# Altium PCB HAT_ID01_OLED.PcbDoc
Units mm, origin at the board's own origin, x right, y up, seen from the top; angles counter-clockwise.
Board outline 65 x 56 mm, 2 copper layers (Top Layer, Bottom Layer); 57 components, 64 nets, 212 pads, 39 vias.
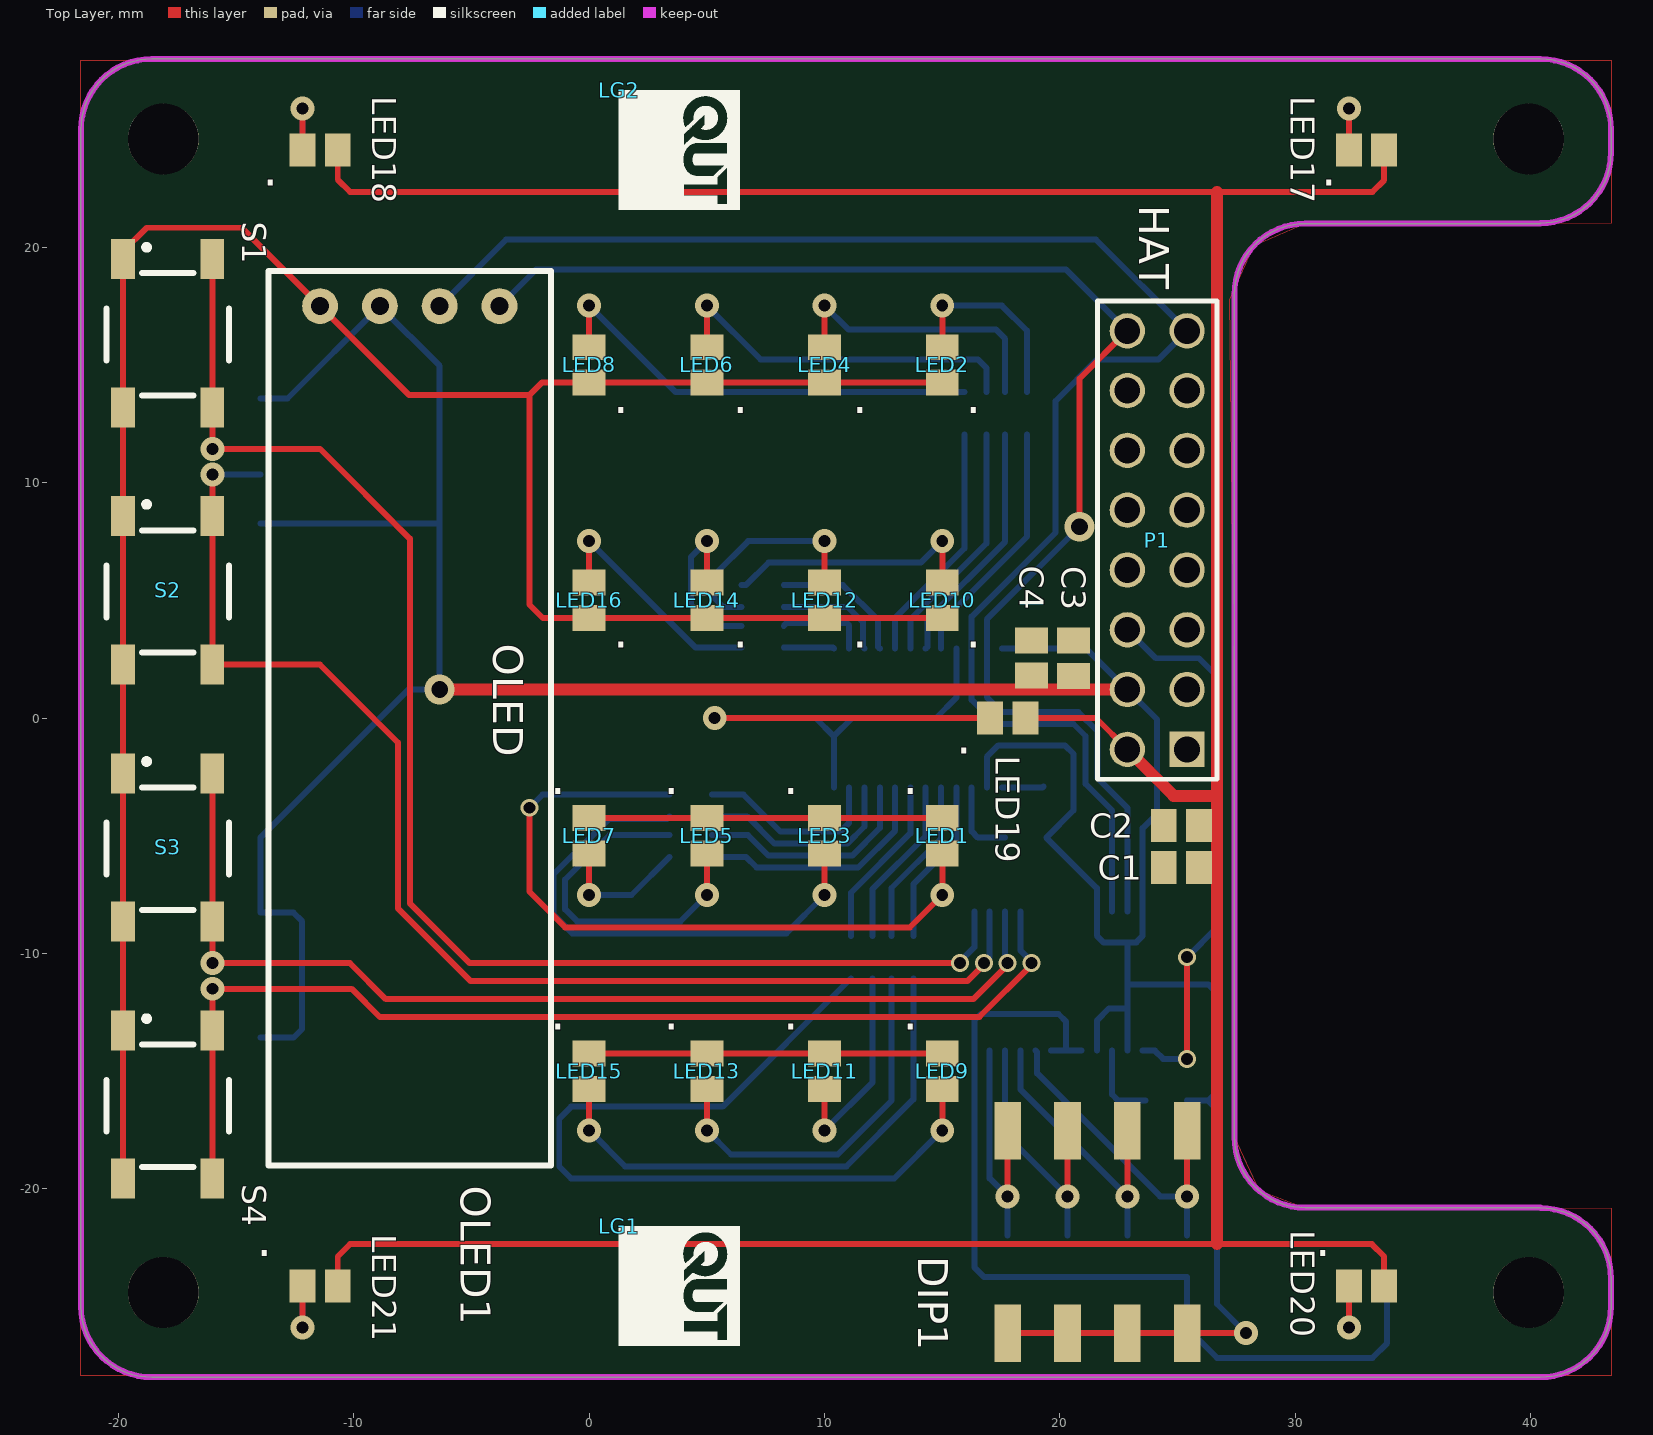
[diagram p0: Top Layer view]
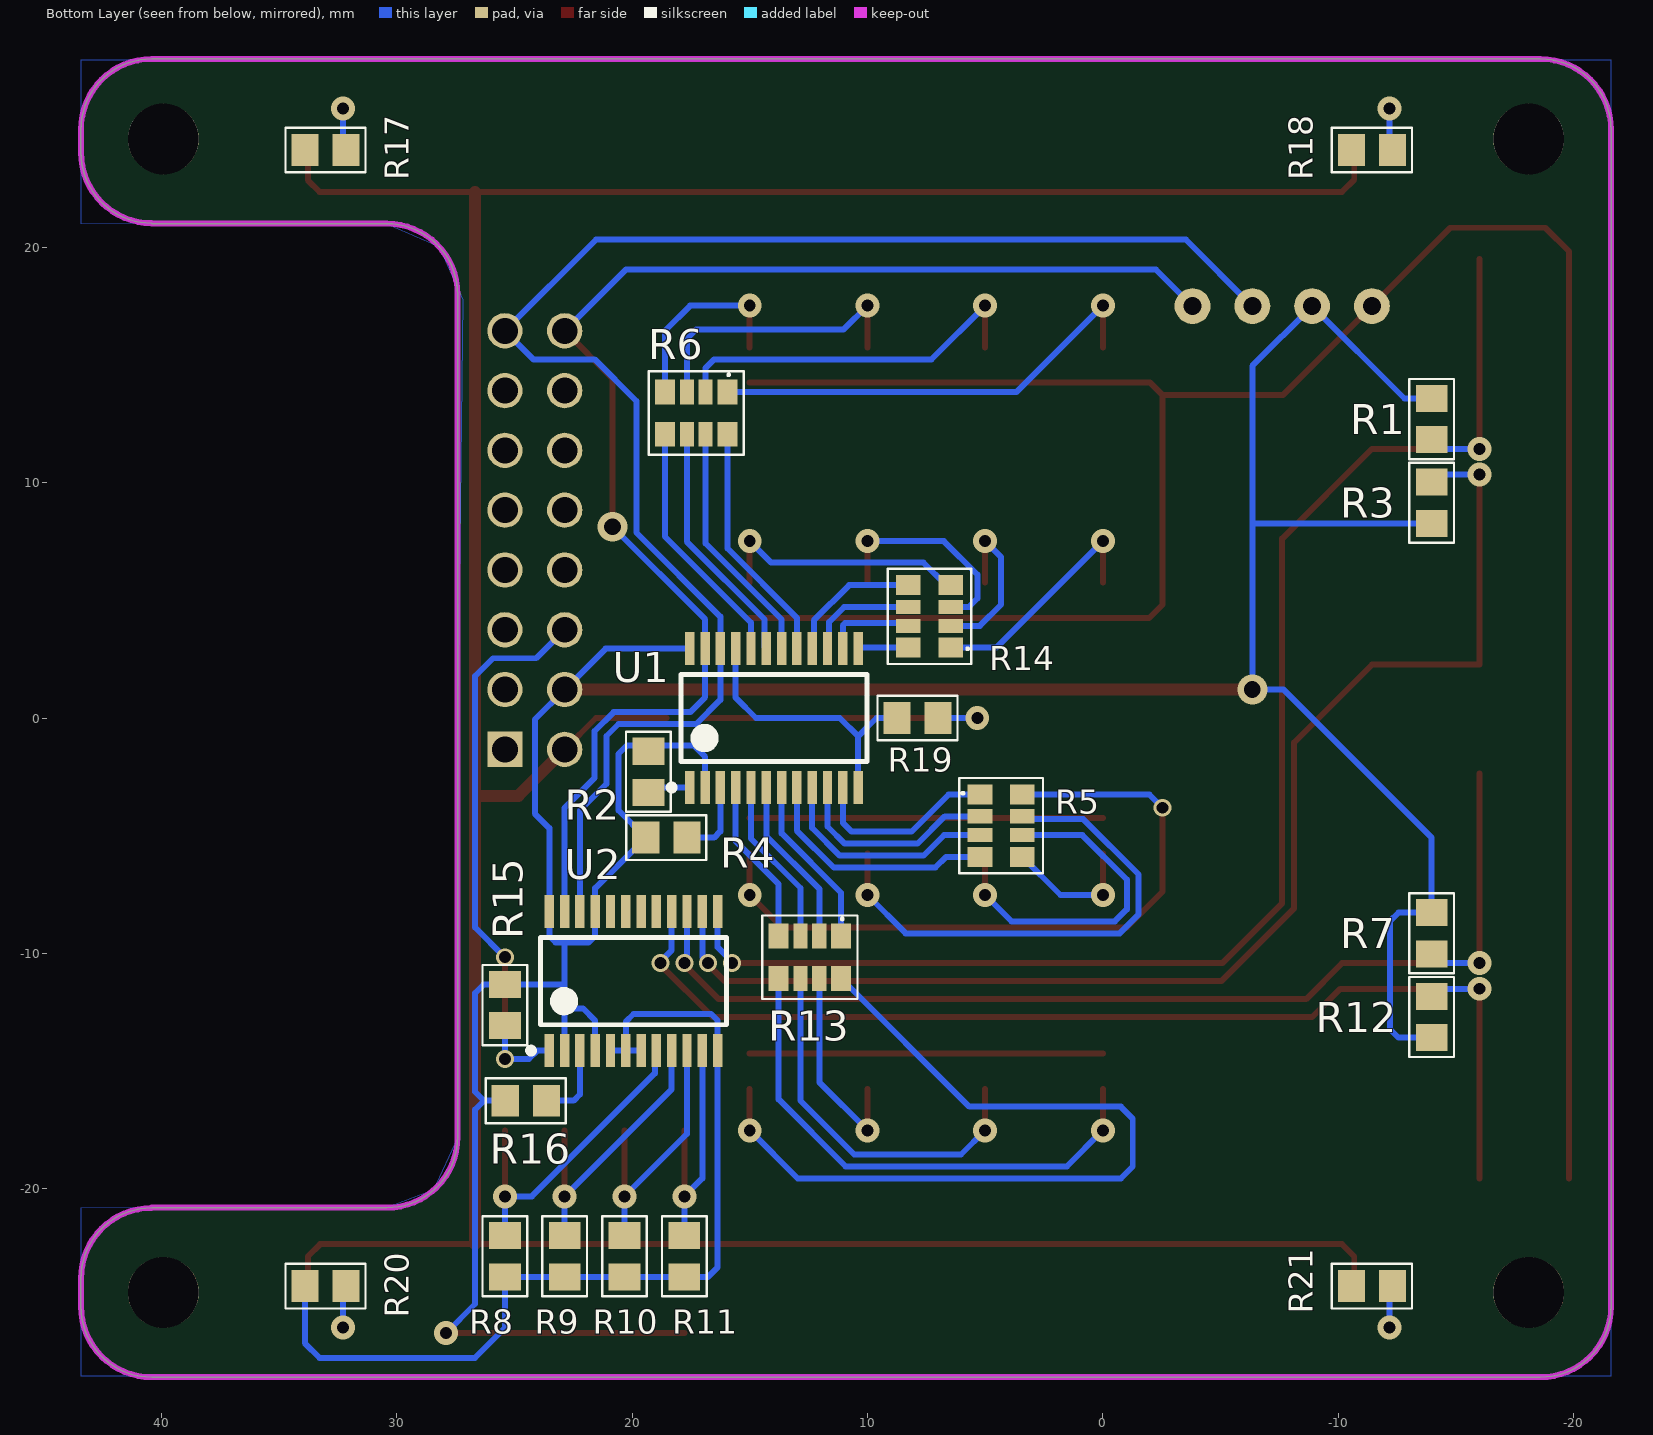
[diagram p1: Bottom Layer view, seen from below]
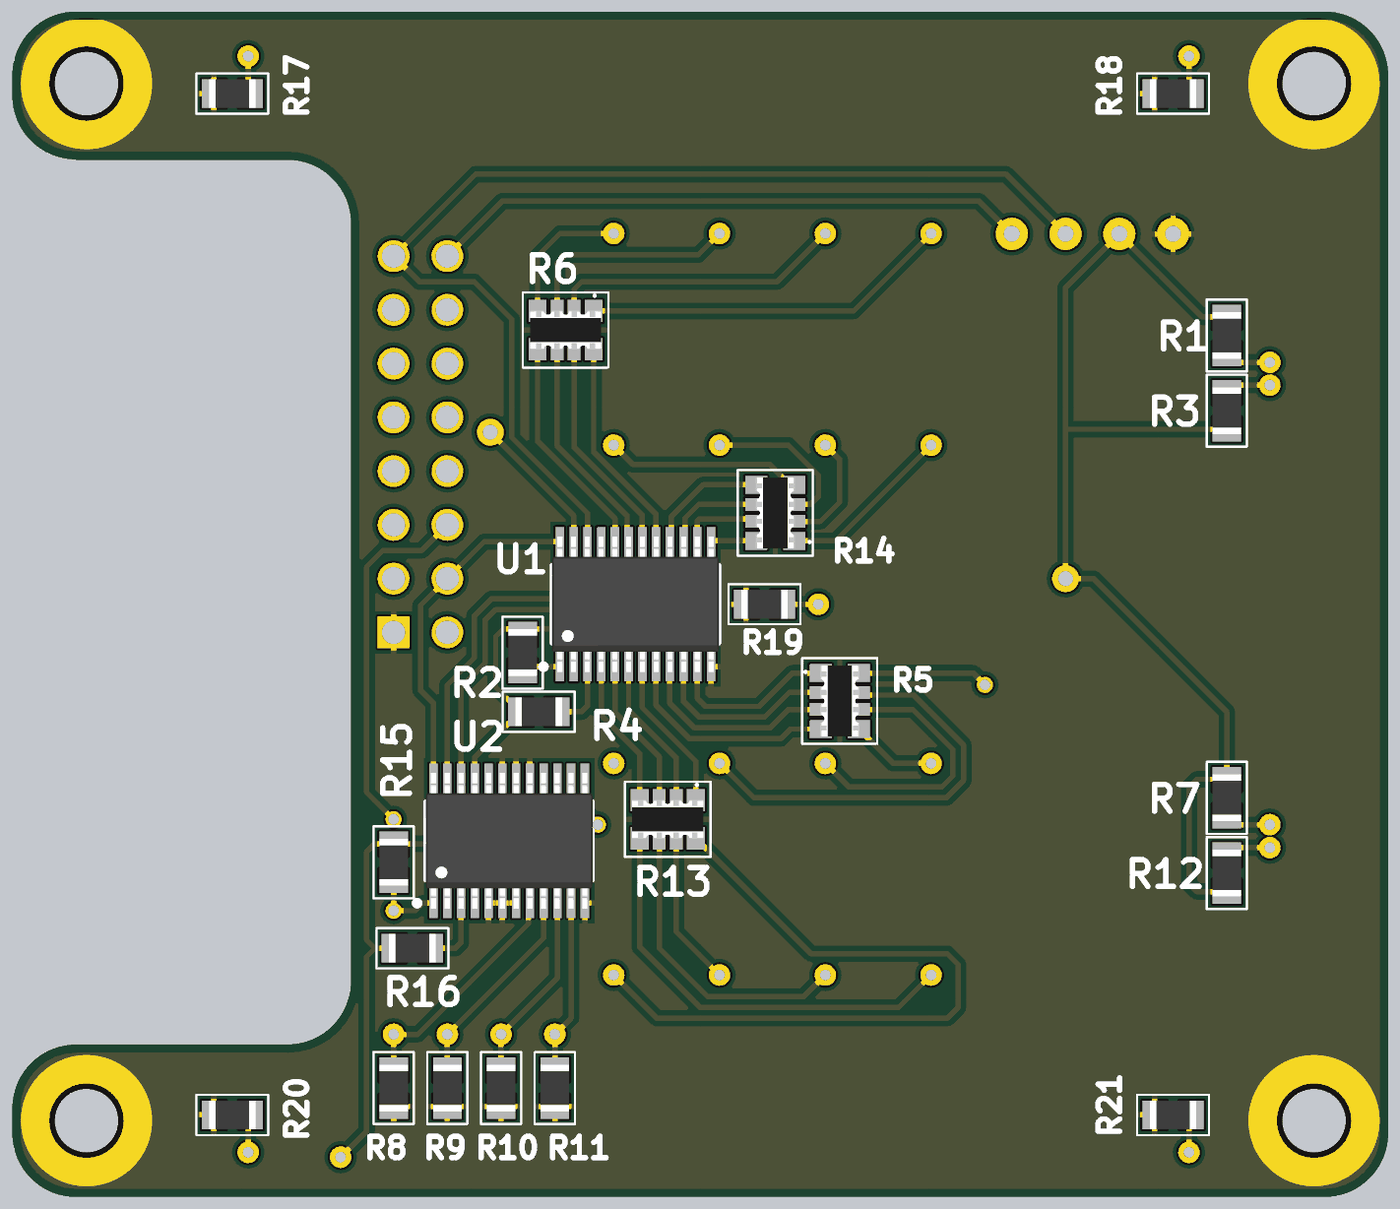
[diagram p2: 3D render of the assembled board from below, using the file's embedded part models]

## Layer stack, top to bottom
Top Solder: solder mask 0.0102, Solder Resist, Dk 3.5
Top Layer: signal copper 0.0356
Dielectric 1: dielectric 0.32, FR-4, Dk 4.8
Bottom Layer: signal copper 0.0356
Bottom Solder: solder mask 0.0102, Solder Resist, Dk 3.5

## Board outline
-21.59,-25 -21.59,25 cw(c-18.59,25) -18.59,28 40.411,28 cw(c40.411,25) 43.411,25 43.41,25 43.41,24.022 cw(c40.41,24.022) 40.41,21.022 40.41,21 30.41,21 ccw(c30.41,18) 27.41,18 27.41,-17.8 ccw(c30.41,-17.8) 30.41,-20.8 40.41,-20.8 40.41,-20.809 cw(c40.41,-23.809) 43.41,-23.809 43.41,-25 cw(c40.41,-25) 40.41,-28 -18.59,-28 cw(c-18.59,-25)

## Design rules (kind name [scope] priority, off if disabled: settings)
Clearance [All] p1: gap=0.254
PolygonConnect [All] p1: connectstyle=Relief reliefconductorwidth=0.254 reliefentries=4 polygonreliefangle="90 Angle" airgapwidth=0.254
RoutingVias [All] p1: holewidth=0.711 width=1.27 viastyle="Through Hole" minholewidth=0.711 minwidth=1.27 maxholewidth=0.711 maxwidth=1.27
SolderMaskExpansion [All] p1: expansion=0.102
Width [All] p1: maxlimit=0.508 minlimit=0.254 preferedwidth=0.254
30 further rules are at their usual default settings.

## Components (designator, comment, footprint, x,y, rotation, side; value= is the part's Value field where it differs from the comment)
C1 "CAP SMD" C0805 25.158,-6.35 r0 top
C2 "CAP SMD" C0805 25.158,-4.572 r0 top
C3 "CAP SMD" C0805 20.574,2.54 r270 top
C4 "CAP SMD" C0805 18.796,2.552 r270 top
DIP1 "DIP Switch (4way)" "DIP SMD" 25.4,-26.126 r0 top locked
LED1 "LED*" C0805 15,-5 r90 top
LED2 "LED*" C0805 15,15 r270 top
LED3 "LED*" C0805 10,-5 r90 top
LED4 "LED*" C0805 10,15 r270 top
LED5 "LED*" C0805 5,-5 r90 top
LED6 "LED*" C0805 5,15 r270 top
LED7 "LED*" C0805 0,-5 r90 top
LED8 "LED*" C0805 0,15 r270 top
LED9 "LED*" C0805 15,-15 r90 top
LED10 "LED*" C0805 15,5 r270 top
LED11 "LED*" C0805 10,-15 r90 top
LED12 "LED*" C0805 10,5 r270 top
LED13 "LED*" C0805 5,-15 r90 top
LED14 "LED*" C0805 5,5 r270 top
LED15 "LED*" C0805 0,-15 r90 top
LED16 "LED*" C0805 0,5 r270 top
LED17 "LED*" C0805 33.02,24.13 r180 top
LED18 "LED*" C0805 -11.43,24.13 r180 top
LED19 "LED*" C0805 17.78,0 r180 top
LED20 "LED*" C0805 33.02,-24.13 r180 top
LED21 "LED*" C0805 -11.43,-24.13 r180 top
LG1 "QUT_Logo" QUT_Logo 1.27,-21.59 r270 top
LG2 "QUT_Logo" QUT_Logo 1.27,26.67 r270 top
OLED1 "OLED" OLED -7.62,17.5 r270 top locked
P1 "HAT" HDR2X8 25.4,-1.33 r90 top locked
R1 "RES SMD" RESC2012X07N -13.97,12.7 r270 bottom
R2 "RES SMD" RESC2012X07N 19.304,-2.286 r90 bottom
R3 "RES SMD" RESC2012X07N -13.97,9.144 r90 bottom
R4 "RES SMD" RESC2012X07N 18.542,-5.08 r0 bottom
R5 "ARRAY" CAC-80P319X155-8M 4.318,-4.572 r180 bottom
R6 "ARRAY" CAC-80P319X155-8M 17.272,12.954 r270 bottom
R7 "RES SMD" RESC2012X07N -13.97,-9.144 r270 bottom
R8 "RES SMD" RESC2012X07N 25.4,-22.86 r90 bottom
R9 "RES SMD" RESC2012X07N 22.86,-22.86 r90 bottom
R10 "RES SMD" RESC2012X07N 20.32,-22.86 r90 bottom
R11 "RES SMD" RESC2012X07N 17.78,-22.86 r90 bottom
R12 "RES SMD" RESC2012X07N -13.97,-12.7 r90 bottom
R13 "ARRAY" CAC-80P319X155-8M 12.446,-10.16 r270 bottom
R14 "ARRAY" CAC-80P319X155-8M 7.366,4.318 r0 bottom
R15 "RES SMD" RESC2012X07N 25.4,-12.192 r90 bottom
R16 "RES SMD" RESC2012X07N 24.511,-16.256 r0 bottom
R17 "RES SMD" RESC2012X07N 33.02,24.13 r180 bottom
R18 "RES SMD" RESC2012X07N -11.43,24.13 r180 bottom
R19 "RES SMD" RESC2012X07N 7.874,0 r180 bottom
R20 "RES SMD" RESC2012X07N 33.02,-24.13 r180 bottom
R21 "RES SMD" RESC2012X07N -11.43,-24.13 r180 bottom
S1 "B1" E-SWITCH-TL3342 -19.802,19.498 r270 top
S2 "B1" E-SWITCH-TL3342 -19.802,8.576 r270 top
S3 "B1" E-SWITCH-TL3342 -19.802,-2.346 r270 top
S4 "B1" E-SWITCH-TL3342 -19.802,-13.268 r270 top
U1 "PCA6416A" TSOP65P640X110-24N 13.97,0 r90 bottom
U2 "PCA6416A" TSOP65P640X110-24N 19.939,-11.176 r90 bottom

## Footprints (in the part's own frame and the unit in brackets; to place one, negate y for a bottom-side part, rotate by r counter-clockwise, add the part's x,y. Pads: shape width x height; smd on the part's side, far side on the other; paste and mask are expansions set on the pad)
C0805 [mm] "Chip Capacitor, Body 2.0x1.3mm, IPC High Density"
  rect 1.1x1.4 smd: 1(-0.75,0) 2(0.75,0)
  body extent -1.1,-0.72 1.1,0.72, height 1.4
CAC-80P319X155-8M [mm] "Chip Array, ConvexS, 8-Leads, Pitch 0.80mm,  Body 3.20x1.55mm,  IPC Low Density"
  rect 1.05x0.85 smd: 1(-0.9,1.325) 4(-0.9,-1.325) 5(0.9,-1.325) 8(0.9,1.325)
  rect 1.05x0.6 smd: 2(-0.9,0.4) 3(-0.9,-0.4) 6(0.9,-0.4) 7(0.9,0.4)
  silkscreen extent -1.78,-2.02 1.78,2.02, body extent -0.92,-1.67 0.93,1.67, height 0.7
"DIP SMD" [mm] "Digikey CT2194MST-ND"
  rect 1.13x2.44 smd: 0(-7.62,0) 1(-5.08,0) 2(-2.54,0) 3(0,0) 4(0,8.6) 5(-2.54,8.6) 6(-5.08,8.6) 7(-7.62,8.6)
E-SWITCH-TL3342 [mm]
  rect 1.7x1 smd: 1(0,0) 2(6.3,0) 3(0,3.8) 4(6.3,3.8)
  silkscreen extent -0.6,-0.7 5.8,4.5, body extent 0,-0.7 6.4,4.5, height 1.54
HDR2X8 [mm] "Connector; Header; 8x2 Position"
  rect 1.5x1.5 hole 1.1: 1(0,0)
  round 1.5 hole 1.1: 2(0,2.54) 3(2.54,0) 4(2.54,2.54) 5(5.08,0) 6(5.08,2.54) 7(7.62,0) 8(7.62,2.54) 9(10.16,0) 10(10.16,2.54) 11(12.7,0) 12(12.7,2.54) 13(15.24,0) 14(15.24,2.54) 15(17.78,0) 16(17.78,2.54)
  silkscreen extent -1.27,-1.27 19.05,3.81
OLED [mil]
  round 60 hole 30: 1(0,-150) 2(0,-50) 3(0,50) 4(0,150)
  silkscreen extent -59,-236 1437,236
QUT_Logo [mm]
  silkscreen extent 0,0.01 5.08,5.12
RESC2012X07N [mm] "Chip Resistor, 2-Leads, Body 2.00x1.25mm, IPC Medium Density"
  rect 1.15x1.35 smd: 1(-0.875,0) 2(0.875,0)
  silkscreen extent -1.7,-0.95 1.7,0.95, body extent -1.1,-0.68 1.1,0.67, height 0.7
TSOP65P640X110-24N [mm] "TSOP, 24-Leads, Body 7.80x4.40mm, Pitch 0.65mm, IPC Medium Density"
  rect 1.4x0.4 smd: 1(-2.95,3.575) 2(-2.95,2.925) 3(-2.95,2.275) 4(-2.95,1.625) 5(-2.95,0.975) 6(-2.95,0.325) 7(-2.95,-0.325) 8(-2.95,-0.975) 9(-2.95,-1.625) 10(-2.95,-2.275) 11(-2.95,-2.925) 12(-2.95,-3.575) 13(2.95,-3.575) 14(2.95,-2.925) 15(2.95,-2.275) 16(2.95,-1.625) 17(2.95,-0.975) 18(2.95,-0.325) 19(2.95,0.325) 20(2.95,0.975) 21(2.95,1.625) 22(2.95,2.275) 23(2.95,2.925) 24(2.95,3.575)
  silkscreen extent -3.07,-3.95 1.85,4.47, body extent -3.2,-3.95 3.2,3.95, height 1.1

## Part data
C1 C2 C3 C4: "Surface mount capacitor"
LED1 LED2 LED3 LED4 LED5 LED6 LED7 LED8 LED9 LED10 LED11 LED12 LED13 LED14 LED15 LED16 LED17 LED18 LED19 LED20 LED21: library part LED
P1: library part "Header 8X2", "Header, 8-Pin, Dual row"
R1 R2 R3 R4 R7 R8 R9 R10 R11 R12 R15 R16 R17 R18 R19 R20 R21: "0805 surface mount resistor"
R5 R6 R13 R14: library part RES-ARRAY, "Surface mount resistor array"
S1 S2 S3 S4: library part E-SWITCH-PUSHBUTTON, "TL 3342 surface mount pushbutton"
U1 U2: library part PCA6416APW, "Low-voltage translating 16-bit I2C I/O port expander"

## Free pads (board coordinates)
  round 3 hole 3 unplated mask+1.6: 0(-18.09,-24.4) 1(39.91,-24.4) 2(39.91,24.6) 3(-18.09,24.6)

## Via types
v1: diameter 1.016, hole 0.508, Top Layer to Bottom Layer, 30 vias
v2: diameter 0.762, hole 0.508, Top Layer to Bottom Layer, 7 vias
v3: diameter 1.27, hole 0.711, Top Layer to Bottom Layer, 2 vias

## Nets (pads, with @x,y where several pads share a name; then routed paths per layer and width w, separated by ;. In a path a pad name is that pad's centre, name@x,y a point inside that pad or via, vN(x,y) a via of type N, cw(c..) or ccw(c..) an arc to the next point about the centre after c; other vN are vias at no path point)
3V3: C3.2 C4.2 DIP1.0 DIP1.1 DIP1.2 DIP1.3 OLED1.2 P1.4 R1.1 R2.2 R3.1 R4.2 R7.1 R12.1 R15.2 R16.2 U1.2 U1.24 U2.2 U2.4 U2.21 U2.24 | length 154.3
  Top Layer w0.254: DIP1.0 DIP1.1 DIP1.2 DIP1.3 v1(27.904,-26.126)
  Top Layer w0.508: v3(-6.35,1.21) P1.4
  Bottom Layer w0.254: R12.1 -12.559,-13.575 -12.192,-13.208 -12.192,-8.636 -12.559,-8.269 R7.1 -13.97,-5.08 -7.68,1.21 v3(-6.35,1.21) -6.35,8.269 ; R3.1 -6.35,8.269 ; R1.1 -12.815,13.575 OLED1.2 -6.35,14.96 -6.35,8.269 ; U1.2 16.895,-1.647 17.385,-1.157 20.207,-1.157 20.574,-1.524 20.574,-3.923 R4.2 21.564,-7.227 U2.21 21.564,-9.245 21.844,-9.525 22.86,-9.525 ; U1.24 21.12,2.95 P1.4 24.13,-0.06 24.13,-4.064 23.514,-4.68 U2.24 23.514,-9.252 23.241,-9.525 22.86,-9.525 ; U2.4 21.564,-12.853 22.084,-12.333 22.864,-12.333 ; U2.2 22.864,-12.333 ; R16.2 26.289,-16.256 ; v1(27.904,-26.126) 26.67,-24.892 26.67,-16.637 26.289,-16.256 ; 22.86,-9.525 22.864,-9.529 22.864,-11.317 ; 22.864,-12.333 22.864,-11.317 ; 22.864,-11.317 R15.2 26.303,-11.317 26.67,-11.684 26.67,-15.875 26.289,-16.256
5V0: C1.2 C2.2 LED17.1 LED18.1 LED19.1 LED20.1 LED21.1 P1.2 | length 149
  Top Layer w0.254: LED21.1 -10.68,-22.872 -10.16,-22.352 26.67,-22.352 33.25,-22.352 33.77,-22.872 LED20.1 ; LED18.1 -10.68,22.872 -10.16,22.352 26.67,22.352 33.274,22.352 33.77,22.848 LED17.1 ; LED19.1 21.53,0 P1.2
  Top Layer w0.508: P1.2 24.832,-3.302 26.67,-3.302 ; 26.67,-22.352 26.67,-3.302 ; 26.67,22.352 26.67,-3.302
BTN0: R1.2 S1.3 S1.4 U2.13 | length 62.4
  Top Layer w0.254: S1.3 S1.4 v1(-16.002,11.43) -11.43,11.43 -7.62,7.62 -7.62,-7.874 -5.08,-10.414 v2(15.748,-10.414)
  Bottom Layer w0.254: v1(-16.002,11.43) R1.2@-13.97,11.43 ; v2(15.748,-10.414) 15.748,-10.352 16.364,-9.736 U2.13
BTN1: R3.2 S2.3 S2.4 U2.14 | length 55.2
  Top Layer w0.254: S2.3 S2.4 -11.44,2.276 -8.128,-1.036 -8.128,-8.084 -5.036,-11.176 16.064,-11.176 16.764,-10.476 v2(16.764,-10.414) ; S2.3@-16.002,8.586 v1(-16.002,10.354)
  Bottom Layer w0.254: v1(-16.002,10.354) R3.2@-13.97,10.354 ; v2(16.764,-10.414) 17.014,-10.164 U2.14
BTN2: R7.2 S3.3 S3.4 U2.15 | length 47.4
  Top Layer w0.254: S3.3 S3.4 v1(-16.002,-10.414) -10.16,-10.414 -8.636,-11.938 16.318,-11.938 17.78,-10.476 v2(17.78,-10.414)
  Bottom Layer w0.254: v1(-16.002,-10.414) R7.2@-13.97,-10.414 ; U2.15 17.664,-10.298 v2(17.78,-10.414)
BTN3: R12.2 S4.3 S4.4 U2.16 | length 48.8
  Top Layer w0.254: S4.4 S4.3 v1(-16.002,-11.5) -10.09,-11.5 -8.89,-12.7 16.572,-12.7 18.796,-10.476 v2(18.796,-10.414)
  Bottom Layer w0.254: v1(-16.002,-11.5) R12.2@-13.97,-11.5 ; U2.16 18.314,-9.87 18.796,-10.352 v2(18.796,-10.414)
DIP0: DIP1.4 R8.2 U2.8 | length 14
  Top Layer w0.254: v1(25.4,-20.32) DIP1.4
  Bottom Layer w0.254: U2.8 19.033,-14.195 19.033,-15.096 24.257,-20.32 v1(25.4,-20.32) R8.2
DIP1: DIP1.5 R9.2 U2.9 | length 12.5
  Top Layer w0.254: v1(22.86,-20.32) DIP1.5
  Bottom Layer w0.254: U2.9 18.314,-15.774 v1(22.86,-20.32) R9.2
DIP2: DIP1.6 R10.2 U2.10 | length 11.8
  Top Layer w0.254: v1(20.32,-20.32) DIP1.6
  Bottom Layer w0.254: U2.10 17.664,-17.664 v1(20.32,-20.32) R10.2
DIP3: DIP1.7 R11.2 U2.11 | length 11
  Top Layer w0.254: v1(17.78,-20.32) DIP1.7
  Bottom Layer w0.254: U2.11 17.014,-19.554 v1(17.78,-20.32) R11.2
GND: C1.1 C2.1 C3.1 C4.1 LED1.2 LED2.2 LED3.2 LED4.2 LED5.2 LED6.2 LED7.2 LED8.2 LED9.2 LED10.2 LED11.2 LED12.2 LED13.2 LED14.2 LED15.2 LED16.2 OLED1.1 P1.1 R8.1 R9.1 R10.1 R11.1 R17.1 R18.1 R19.1 R20.1 R21.1 S1.1 S1.2 S2.1 S2.2 S3.1 S3.2 S4.1 S4.2 U1.12 U1.21 U2.5 U2.6 U2.7 U2.12 U2.17 U2.18 U2.19 U2.20 | length 186.8
  Top Layer w0.254: S4.2 S4.1 S3.2 S3.1 S2.2 S2.1 S1.2 S1.1 -19.802,19.822 -18.796,20.828 -14.758,20.828 OLED1.1 -7.646,13.716 -2.54,13.716 ; LED15.2 LED13.2 LED11.2 LED9.2 ; LED7.2 LED5.2 LED3.2 LED1.2 ; LED10.2 LED12.2 LED14.2 LED16.2 -1.964,4.25 -2.54,4.826 -2.54,13.716 ; LED2.2 LED4.2 LED6.2 LED8.2 -2.006,14.25 -2.54,13.716
  Bottom Layer w0.254: R19.1 9.614,0 10.395,-0.781 ; U1.12 10.395,-0.781 ; U1.21 15.595,0.863 14.732,0 11.176,0 10.395,-0.781 ; U2.7 U2.6 ; U2.5 U2.6 ; R20.1 33.895,-26.557 33.274,-27.178 26.67,-27.178 25.4,-25.908 R8.1 R9.1 R10.1 R11.1 16.764,-23.735 16.364,-23.335 U2.12 16.364,-12.846 16.637,-12.573 19.939,-12.573 20.264,-12.898 U2.6
HAT_00: P1.3
HAT_01: P1.5
HAT_02: P1.7
HAT_03: P1.9
HAT_04: P1.12
HAT_05: P1.10
HAT_06: P1.8
HAT_07: P1.6 R15.1 U2.1 | length 25.1
  Top Layer w0.254: v2(25.4,-14.478) v2(25.4,-10.16)
  Bottom Layer w0.254: P1.6 24.07,2.54 25.908,2.54 26.67,1.778 26.67,-8.89 v2(25.4,-10.16) ; U2.1 24.032,-14.126 24.384,-14.478 v2(25.4,-14.478) R15.1 R15.1@25.4,-12.841
IO0_0: LED15.1 R13.5 | length 22.5
  Top Layer w0.254: v1(0,-17.518) LED15.1
  Bottom Layer w0.254: v1(0,-17.518) 1.532,-19.05 10.922,-19.05 13.771,-16.201 R13.5
IO0_1: LED13.1 R13.6 | length 16.2
  Top Layer w0.254: v1(5,-17.518) LED13.1
  Bottom Layer w0.254: v1(5,-17.518) 6.024,-18.542 10.56,-18.542 12.846,-16.256 R13.6
IO0_2: LED11.1 R13.7 | length 9.1
  Top Layer w0.254: v1(10,-17.518) LED11.1
  Bottom Layer w0.254: v1(10,-17.518) 12.046,-15.472 R13.7
IO0_3: LED9.1 R13.8 | length 36
  Top Layer w0.254: v1(15,-17.518) LED9.1
  Bottom Layer w0.254: R13.8 5.671,-16.51 -0.762,-16.51 -1.27,-17.018 -1.27,-19.05 -0.762,-19.558 12.96,-19.558 v1(15,-17.518)
IO0_4: LED7.1 R5.5 | length 5.9
  Top Layer w0.254: v1(0,-7.518) LED7.1
  Bottom Layer w0.254: v1(0,-7.518) 1.797,-7.518 R5.5
IO0_5: LED5.1 R5.6 | length 14.9
  Top Layer w0.254: v1(5,-7.518) LED5.1
  Bottom Layer w0.254: R5.6 0.87,-4.972 -1.016,-6.858 -1.016,-8.128 -0.508,-8.636 3.882,-8.636 v1(5,-7.518)
IO0_6: LED3.1 R5.7 | length 22
  Top Layer w0.254: v1(10,-7.518) LED3.1
  Bottom Layer w0.254: R5.7 3.299,-4.291 0.833,-4.291 -1.524,-6.648 -1.524,-8.338 -0.718,-9.144 8.374,-9.144 v1(10,-7.518)
IO0_7: LED1.1 R5.8 | length 30.3
  Top Layer w0.254: v2(-2.54,-3.81) -2.54,-7.366 -1.016,-8.89 13.628,-8.89 v1(15,-7.518) LED1.1
  Bottom Layer w0.254: v2(-2.54,-3.81) -1.977,-3.247 R5.8
IO1_0: LED16.1 R14.1 | length 10.1
  Top Layer w0.254: LED16.1 v1(0,7.518)
  Bottom Layer w0.254: v1(0,7.518) 4.525,2.993 R14.1
IO1_1: LED14.1 R14.2 | length 7.3
  Top Layer w0.254: LED14.1 v1(5,7.518)
  Bottom Layer w0.254: v1(5,7.518) 4.318,6.836 4.318,4.826 5.226,3.918 R14.2
IO1_2: LED12.1 R14.3 | length 9.3
  Top Layer w0.254: LED12.1 v1(10,7.518)
  Bottom Layer w0.254: R14.3 5.696,4.718 5.334,5.08 5.334,6.096 6.756,7.518 v1(10,7.518)
IO1_3: LED10.1 R14.4 | length 11.1
  Top Layer w0.254: LED10.1 v1(15,7.518)
  Bottom Layer w0.254: R14.4 6.659,5.643 7.62,6.604 14.086,6.604 v1(15,7.518)
IO1_4: LED8.1 R6.1 | length 19.2
  Top Layer w0.254: LED8.1 v1(0,17.518)
  Bottom Layer w0.254: v1(0,17.518) 3.664,13.854 R6.1
IO1_5: LED6.1 R6.2 | length 15.8
  Top Layer w0.254: LED6.1 v1(5,17.518)
  Bottom Layer w0.254: v1(5,17.518) 7.278,15.24 16.51,15.24 16.872,14.878 R6.2
IO1_6: LED4.1 R6.3 | length 12.3
  Top Layer w0.254: LED4.1 v1(10,17.518)
  Bottom Layer w0.254: v1(10,17.518) 11.008,16.51 17.272,16.51 17.672,16.11 R6.3
IO1_7: LED2.1 R6.4 | length 8.4
  Top Layer w0.254: LED2.1 v1(15,17.518)
  Bottom Layer w0.254: v1(15,17.518) 17.534,17.518 18.597,16.455 R6.4
MISO: P1.14
MOSI: P1.13
NetLED17_2: LED17.2 R17.2 | length 3.6
  Top Layer w0.254: LED17.2 v1(32.27,25.896)
  Bottom Layer w0.254: R17.2 32.27,24.255 v1(32.27,25.896)
NetLED18_2: LED18.2 R18.2 | length 3.6
  Top Layer w0.254: LED18.2 v1(-12.18,25.896)
  Bottom Layer w0.254: R18.2 -12.18,24.255 v1(-12.18,25.896)
NetLED19_2: LED19.2 R19.2 | length 13.1
  Top Layer w0.254: v1@5.588,0 LED19.2
  Bottom Layer w0.254: v1(5.334,0) R19.2
NetLED20_2: LED20.2 R20.2 | length 3.6
  Top Layer w0.254: v1(32.27,-25.896) LED20.2
  Bottom Layer w0.254: R20.2 32.27,-24.255 v1(32.27,-25.896)
NetLED21_2: LED21.2 R21.2 | length 3.6
  Top Layer w0.254: v1(-12.18,-25.896) LED21.2
  Bottom Layer w0.254: R21.2 -12.18,-24.255 v1(-12.18,-25.896)
NetR2_1: R2.1 U1.1 | length 1.8
  Bottom Layer w0.254: U1.1 19.261,-2.95 R2.1@19.304,-2.907
NetR4_1: R4.1 U1.3 | length 3.4
  Bottom Layer w0.254: U1.3 16.245,-4.815 16.51,-5.08 R4.1
NetR5_1: R5.1 U1.11 | length 8.1
  Bottom Layer w0.254: R5.1 6.549,-3.247 8.128,-4.826 10.668,-4.826 11.045,-4.449 U1.11
NetR5_2: R5.2 U1.10 | length 8.9
  Bottom Layer w0.254: R5.2 6.712,-4.172 7.874,-5.334 10.966,-5.334 11.695,-4.605 U1.10
NetR5_3: R5.3 U1.9 | length 9.7
  Bottom Layer w0.254: R5.3 6.75,-4.972 7.62,-5.842 11.176,-5.842 12.345,-4.673 U1.9
NetR5_4: R5.4 U1.8 | length 10.4
  Bottom Layer w0.254: R5.4 6.659,-5.897 7.112,-6.35 11.43,-6.35 12.995,-4.785 U1.8
NetR6_5: R6.5 U1.20 | length 10.6
  Bottom Layer w0.254: U1.20 14.945,4.051 18.597,7.703 R6.5
NetR6_6: R6.6 U1.19 | length 10.5
  Bottom Layer w0.254: U1.19 14.364,3.019 14.364,4.188 17.672,7.496 R6.6
NetR6_7: R6.7 U1.18 | length 10.4
  Bottom Layer w0.254: U1.18 13.645,4.187 16.872,7.414 R6.7
NetR6_8: R6.8 U1.17 | length 10.3
  Bottom Layer w0.254: U1.17 12.995,4.256 15.947,7.208 R6.8
NetR13_1: R13.1 U1.7 | length 7.4
  Bottom Layer w0.254: R13.1 11.121,-7.421 13.645,-4.897 U1.7
NetR13_2: R13.2 U1.6 | length 7.2
  Bottom Layer w0.254: R13.2 12.046,-7.258 14.295,-5.009 U1.6
NetR13_3: R13.3 U1.5 | length 7.2
  Bottom Layer w0.254: R13.3 12.846,-7.22 14.945,-5.121 U1.5
NetR13_4: R13.4 U1.4 | length 7.1
  Bottom Layer w0.254: R13.4 13.771,-7.057 15.595,-5.233 U1.4
NetR14_5: R14.5 U1.16 | length 5.9
  Bottom Layer w0.254: R14.5 10.78,5.643 12.276,4.147 12.276,3.019 U1.16
NetR14_6: R14.6 U1.15 | length 4.8
  Bottom Layer w0.254: R14.6 10.986,4.718 11.626,4.078 11.626,3.019 U1.15
NetR14_7: R14.7 U1.14 | length 3.9
  Bottom Layer w0.254: R14.7 8.379,4.031 10.955,4.031 11.045,3.941 U1.14
NetR14_8: R14.8 U1.13 | length 2.1
  Bottom Layer w0.254: R14.8 10.352,2.993 U1.13
NetR16_1: R16.1 U2.3 | length 3.4
  Bottom Layer w0.254: U2.3 22.214,-15.991 22.479,-16.256 R16.1
SCL: OLED1.3 P1.15 U1.22 U2.22 | length 69
  Top Layer w0.254: P1.15@25.34,16.45 P1.15
  Bottom Layer w0.254: OLED1.3 -3.53,20.32 21.53,20.32 P1.15 24.19,15.24 21.59,15.24 19.812,13.462 19.812,7.874 16.245,4.307 U1.22 16.245,0.773 17.272,-0.254 20.574,-0.254 21.082,-0.762 21.082,-2.794 22.214,-3.926 U2.22
SCLK: P1.11
SDA: OLED1.4 P1.16 U1.23 U2.23 | length 59.9
  Top Layer w0.254: v3(20.828,8.128) 20.828,14.418 P1.16
  Bottom Layer w0.254: OLED1.4 -2.26,19.05 20.26,19.05 P1.16 ; v3(20.828,8.128) 16.895,4.195 U1.23 16.895,0.885 17.526,0.254 20.784,0.254 21.59,-0.552 21.59,-2.54 22.864,-3.814 U2.23

## Polygon pours and split planes (outlines as drawn)
GND on Bottom Layer "Bottom Layer-GND" (solid, shelved, pour order 0): -21.59,-27.94 -21.59,27.94 43.411,27.94 43.411,21.021 30.41,21 28.216,20.046 27.184,17.774 27.41,0.508 27.41,-17.8 28.446,-20.068 30.41,-20.8 43.411,-20.824 43.411,-27.94
GND on Top Layer "TOP Layer-GND" (solid, shelved, pour order 4): -21.59,-27.94 -21.59,27.94 43.411,27.94 43.411,21.021 30.41,21 28.216,20.046 27.184,17.774 27.41,0.508 27.41,-17.8 28.446,-20.068 30.41,-20.8 43.411,-20.824 43.411,-27.94

## Keep-outs
Keep-Out Layer:
  lines w0.254: 40.41,-20.809 cw(c40.41,-23.809) 43.41,-23.809 43.41,-25 cw(c40.41,-25) 40.41,-28 -18.59,-28 cw(c-18.59,-25) -21.59,-25 -21.59,-23.435 -21.59,23.435 -21.59,25 cw(c-18.59,25) -18.59,28 40.411,28 cw(c40.411,25) 43.411,25 ; 40.41,-20.8 30.41,-20.8 cw(c30.41,-17.8) 27.41,-17.8 27.41,18 cw(c30.41,18) 30.41,21 40.41,21 ; 40.41,21.022 ccw(c40.41,24.022) 43.41,24.022 43.41,25

## Silkscreen, mask and mechanical layers (free items; w line width, h text height)
Top Overlay:
  text "." at -13.208,22.86 h1.52 r180
  text "." at 31.75,22.86 h1.52 r180
  text "." at 1.016,12.954 h1.52
  text "." at 6.096,12.954 h1.52
  text "." at 11.176,12.954 h1.52
  text "." at 16.002,12.954 h1.52
  text "." at 1.016,2.98 h1.52
  text "." at 6.096,2.98 h1.52
  text "." at 11.176,2.98 h1.52
  text "." at 16.002,2.98 h1.52
  text "." at 16.256,-1.27 h1.52 r180
  text "." at -1.002,-2.98 h1.52 r180
  text "." at 3.824,-2.98 h1.52 r180
  text "." at 8.904,-2.98 h1.52 r180
  text "." at 13.984,-2.98 h1.52 r180
  text "." at -1.002,-12.98 h1.52 r180
  text "." at 3.824,-12.98 h1.52 r180
  text "." at 8.904,-12.98 h1.52 r180
  text "." at 13.984,-12.98 h1.52 r180
  text "." at -13.462,-22.606 h1.52 r180
  text "." at 31.496,-22.606 h1.52 r180
Mechanical 1:
  lines w0.254: 40.41,-20.809 cw(c40.41,-23.809) 43.41,-23.809 43.41,-25 cw(c40.41,-25) 40.41,-28 -18.59,-28 cw(c-18.59,-25) -21.59,-25 -21.59,-23.435 -21.59,23.435 -21.59,25 cw(c-18.59,25) -18.59,28 40.411,28 cw(c40.411,25) 43.411,25 ; 40.41,-20.8 30.41,-20.8 cw(c30.41,-17.8) 27.41,-17.8 27.41,18 cw(c30.41,18) 30.41,21 40.41,21 ; 40.41,21.022 ccw(c40.41,24.022) 43.41,24.022 43.41,25